# Altium PCB USB Charger Project.PcbDoc
Units mil, origin at the board's own origin, x right, y up, seen from the top; angles counter-clockwise.
Board outline 1750 x 2560 mil, 2 copper layers (Top Layer, Bottom Layer); 36 components, 19 nets, 143 pads, 23 vias.
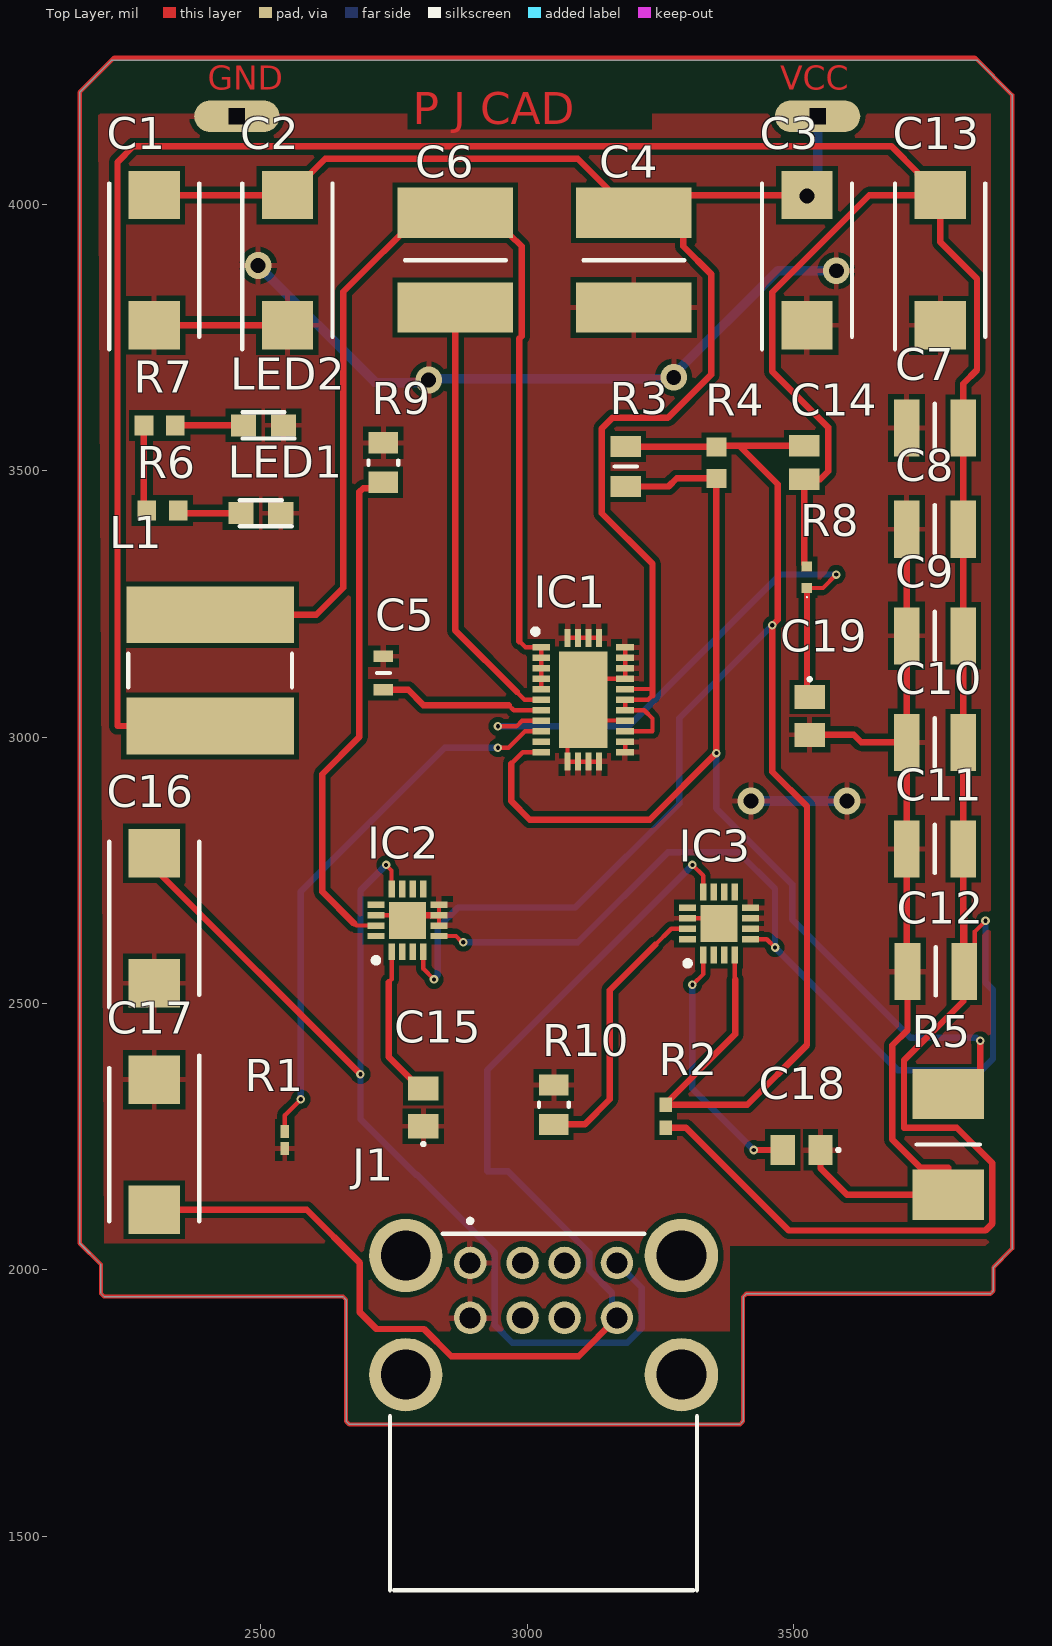
[diagram p0: Top Layer view]
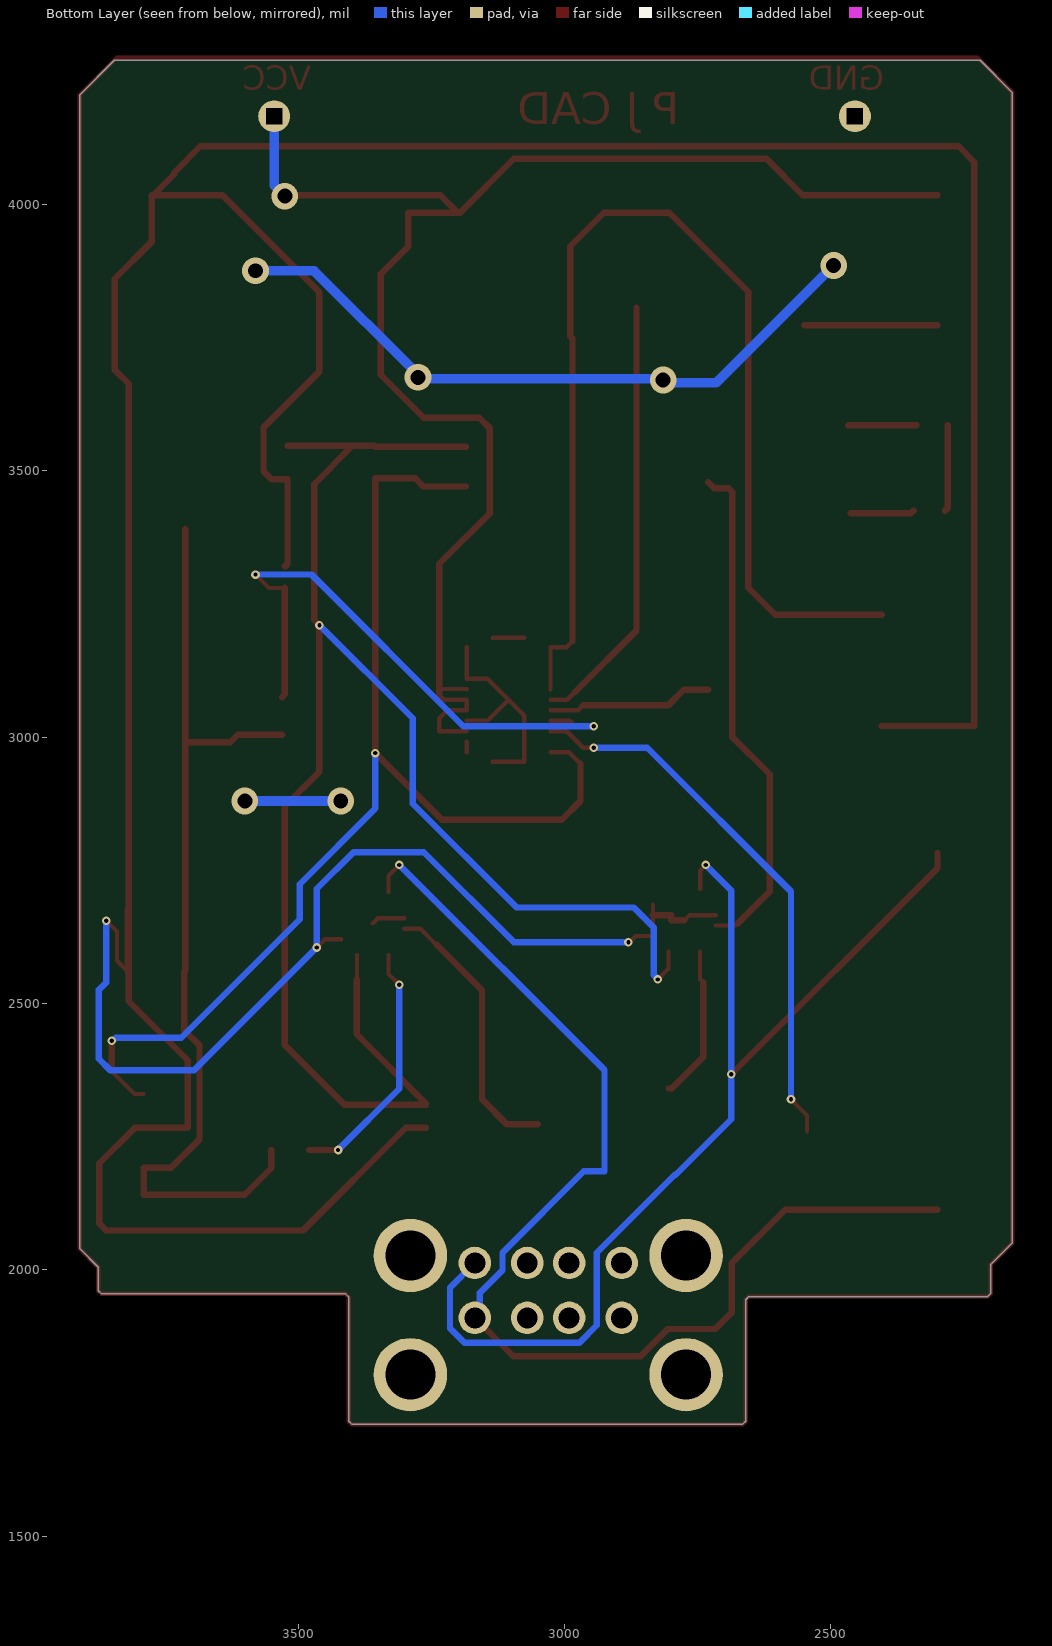
[diagram p1: Bottom Layer view, seen from below]
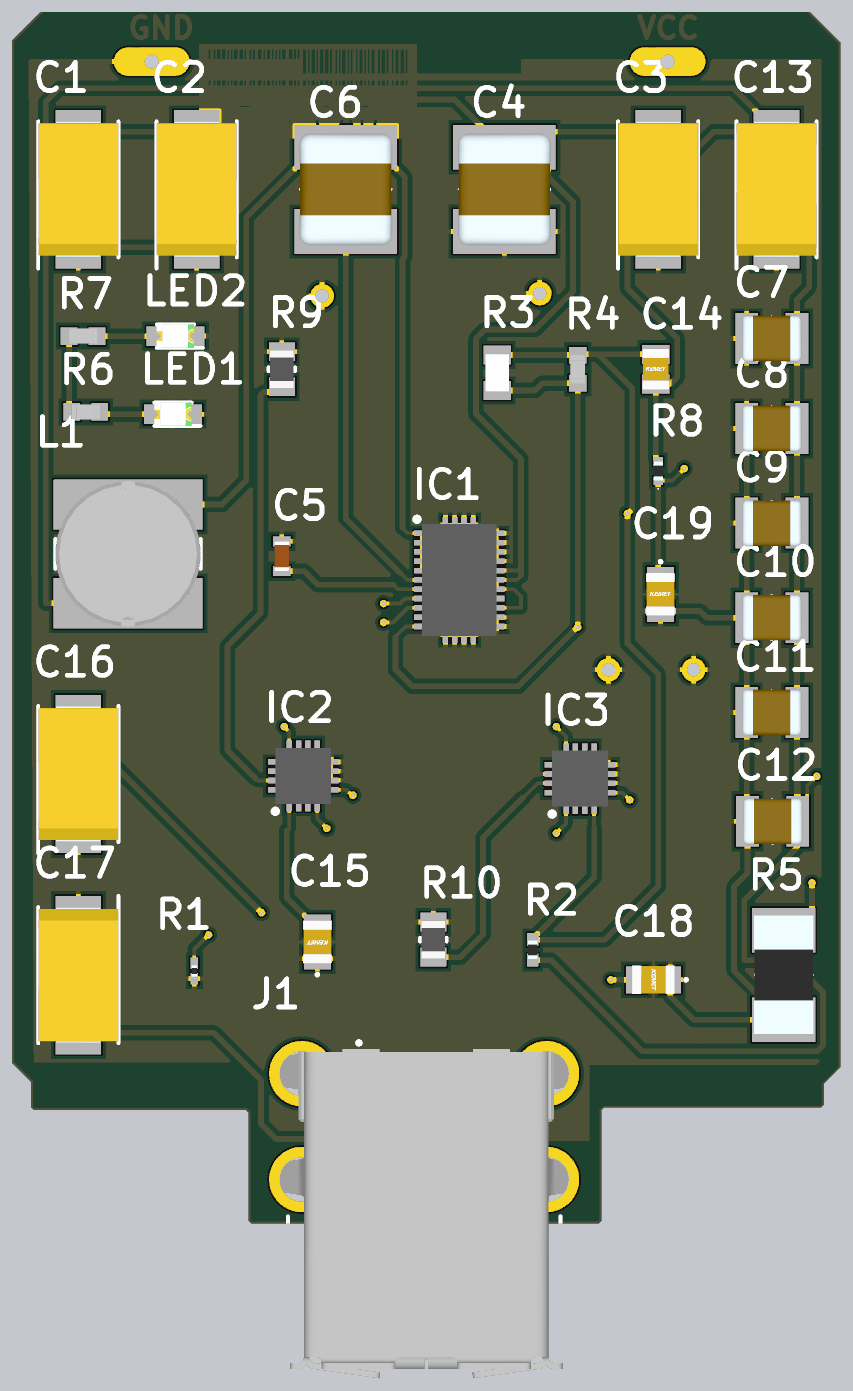
[diagram p2: 3D render of the assembled board from above, using the file's embedded part models]

## Layer stack, top to bottom
Top Solder: solder mask 0.4, Solder Resist, Dk 3.5
Top Layer: signal copper 1.4
Dielectric 1: dielectric 12.6, FR-4, Dk 4.8
Bottom Layer: signal copper 1.4
Bottom Solder: solder mask 0.4, Solder Resist, Dk 3.5

## Board outline
2205.86,1950 2654.14,1950 2660,1944.14 2660,1715.86 2665.86,1710 3399.14,1710 3405,1715.86 3405,1949.14 3410.86,1955 3869.14,1955 3875,1960.86 3875,2005 3910,2040 3910,4205 3845,4270 2220,4270 2160,4210 2160,2050 2200,2010 2200,1955.86

## Design rules (kind name [scope] priority, off if disabled: settings)
Clearance [All] p1: gap=10 ignorepadtopadclearanceinfootprint=FALSE except(0: Arc-Hole Track-Hole SMDPad-Hole THPad-Hole Via-Hole Fill-Hole Poly-Hole Region-Hole Text-Hole)
PolygonConnect [All] p1: connectstyle=Relief reliefconductorwidth=10 reliefentries=4 polygonreliefangle="90 Angle" airgapwidth=10
RoutingVias [All] p1: holewidth=8 width=16 viastyle="Through Hole" minholewidth=8 minwidth=16 maxholewidth=8 maxwidth=16
SolderMaskExpansion [All] p1: expansion=4 istentingtop=FALSE
Width [All] p1: maxlimit=12 minlimit=8 preferedwidth=12 toplayer_prefwidth=8 minimp=50.000000 maximp=50.000000 favimp=50.000000
30 further rules are at their usual default settings.

## Components (designator, comment, footprint, x,y, rotation, side; value= is the part's Value field where it differs from the comment)
C1 "10uF" CAPPM7343X120N 2300,3895 r90 top
C2 "10uF" CAPPM7343X120N 2550,3895 r90 top
C3 "10uF" CAPPM7343X120N 3525,3895 r90 top
C4 "0.47uF" CAPC6050X550N 3200,3895 r90 top
C5 "2.2uF" CAPC1608X80N 2730,3120 r90 top
C6 "0.47uF" CAPC6050X550N 2865,3895 r270 top
C7 "47uF" CAPC3225X270N 3765,3580 r0 top
C8 "47uF" CAPC3225X270N 3765,3390 r0 top
C9 "47uF" CAPC3225X270N 3765,3190 r0 top
C10 "47uF" CAPC3225X270N 3765,2990 r0 top
C11 "47uF" CAPC3225X270N 3765,2790 r0 top
C12 "47uF" CAPC3225X270N 3766.85,2560 r0 top
C13 "10uF" CAPPM7343X120N 3775,3895 r90 top
C14 "0.022uF" CAPC2012X88N 3520,3515 r270 top
C15 "0.1uF" C0805 2805,2305 r90 top
C16 "10uF" CAPPM7343X120N 2300,2660 r90 top
C17 "10uF" CAPPM7343X120N 2300,2235 r270 top
C18 "0.1uF" C0805 3515,2225 r180 top
C19 "0.1uF" C0805 3530,3039.57 r270 top
IC1 "LM73606" QFN50P400X600X80-31N-D 3105,3070 r0 top
IC2 "TPS2549IRTERQ1" QFN50P300X300X80-17N-D 2775.16,2655.94 r90 top
IC3 "TPS2549IRTERQ1" QFN50P300X300X80-17N-D 3360,2650 r90 top
J1 "5787745-4" 57877454 2892.83,2013.15 r0 top
L1 "6.8uH" SDR08056R8ML 2405,3125 r180 top
LED1 "green" LEDM2012X80N 2500,3420 r180 top
LED2 "green" LEDM2012X80N 2505,3585 r180 top
R1 "112k" RESC0603X28N 2545,2243.78 r90 top
R2 "2.1k" RESC1005X35N 3260,2288.35 r270 top
R3 "47k" RESC2012X65N 3185,3507.6 r90 top
R4 "200k" RESC1608X55N 3355,3515 r90 top
R5 "10k" RESC6432X120N 3790,2235.51 r90 top
R6 "715" RESC1608X55N 2315.47,3425 r0 top
R7 "715" RESC1608X55N 2310,3585 r0 top
R8 "3.0R" ERJ2RKD1004X 3525,3300 r90 top
R9 "20K" RESC2013X65N 2730,3515 r270 top
R10 "20K" RESC2013X65N 3050,2310 r270 top

## Footprints (in the part's own frame and the unit in brackets; to place one, negate y for a bottom-side part, rotate by r counter-clockwise, add the part's x,y. Pads: shape width x height; smd on the part's side, far side on the other; paste and mask are expansions set on the pad)
57877454 [mm]
  round 1.55 hole 1: 1(0,0) 2(2.5,0) 3(4.5,0) 4(7,0) 5(0,-2.62) 6(2.5,-2.62) 7(4.5,-2.62) 8(7,-2.62)
  round 3.5 hole 2.38: MH1(-3.07,0.35) MH2(-3.07,-5.33) MH3(10.07,0.35) MH4(10.07,-5.33)
  silkscreen extent -3.81,-15.61 10.81,2.1, body extent -4.51,-16 11.73,1.68, height 15.97
C0805 [mm]
  rect 1.15x1.45 smd: 1(-0.9,0) 2(0.9,0)
  silkscreen extent -1.8,-0.05 -1.7,0.05, body extent -1.15,-0.78 1.15,0.77, height 0.98
CAPC1608X80N [mm]
  rect 0.54x0.94 smd: 1(-0.8,0) 2(0.8,0)
  silkscreen extent 0,-0.3 0,0.3, body extent -0.8,-0.4 0.8,0.4, height 0.8
CAPC2012X88N [mm]
  rect 1.02x1.47 smd: 1(-0.8,0) 2(0.8,0)
  body extent -1.1,-0.73 1.1,0.72, height 0.88
CAPC3225X270N [mm]
  rect 1.22x2.72 smd: 1(-1.35,0) 2(1.35,0)
  silkscreen extent 0,-1.15 0,1.15, body extent -1.6,-1.25 1.6,1.25, height 2.7
CAPC6050X550N [mm]
  rect 2.39x5.51 smd: 1(-2.26,0) 2(2.26,0)
  silkscreen extent 0,-2.4 0,2.4, body extent -3,-2.5 3,2.5, height 5.5
CAPPM7343X120N [mm]
  rect 2.3x2.45 smd: 1(-3.1,0) 2(3.1,0)
  silkscreen extent -4.25,-2.15 3.65,2.15, body extent -3.65,-2.15 3.65,2.15, height 1.2
ERJ2RKD1004X [mm]
  rect 0.475x0.5 smd: 1(-0.512,0) 2(0.512,0)
  silkscreen extent -0.97,-0.03 -0.93,0.03, body extent -0.5,-0.25 0.5,0.25, height 0.35
LEDM2012X80N [mm]
  rect 1.2x1.05 smd: 1(-0.95,0) 2(0.95,0)
  silkscreen extent -1.47,-0.62 1,0.62, body extent -1,-0.63 1,0.63, height 0.7
QFN50P300X300X80-17N-D [mm]
  rect 0.8x0.3 smd: 1(-1.5,0.75) 2(-1.5,0.25) 3(-1.5,-0.25) 4(-1.5,-0.75) 9(1.5,-0.75) 10(1.5,-0.25) 11(1.5,0.25) 12(1.5,0.75)
  rect 0.3x0.8 smd: 5(-0.75,-1.5) 6(-0.25,-1.5) 7(0.25,-1.5) 8(0.75,-1.5) 13(0.75,1.5) 14(0.25,1.5) 15(-0.25,1.5) 16(-0.75,1.5)
  rect 1.76x1.76 smd: 17(0,0)
  silkscreen extent -2.02,1.37 -1.78,1.62, body extent -1.5,-1.5 1.5,1.5, height 0.8
QFN50P400X600X80-31N-D [mm]
  rect 0.85x0.3 smd: 1(-2,2.5) 2(-2,2) 3(-2,1.5) 4(-2,1) 5(-2,0.5) 6(-2,0) 7(-2,-0.5) 8(-2,-1) 9(-2,-1.5) 10(-2,-2) 11(-2,-2.5) 16(2,-2.5) 17(2,-2) 18(2,-1.5) 19(2,-1) 20(2,-0.5) 21(2,0) 22(2,0.5) 23(2,1) 24(2,1.5) 25(2,2) 26(2,2.5)
  rect 0.3x0.85 smd: 12(-0.75,-2.95) 13(-0.25,-2.95) 14(0.25,-2.95) 15(0.75,-2.95) 27(0.75,2.95) 28(0.25,2.95) 29(-0.25,2.95) 30(-0.75,2.95)
  rect 2.3x4.6 smd: 31(0,0)
  silkscreen extent -2.4,3.13 -2.15,3.37, body extent -2,-3 2,3, height 0.8
RESC0603X28N [mm]
  rect 0.625x0.4 smd: 1(-0.412,0) 2(0.412,0)
  body extent -0.3,-0.15 0.3,0.15, height 0.28
RESC1005X35N [mm]
  rect 0.7x0.6 smd: 1(-0.55,0) 2(0.55,0)
  body extent -0.5,-0.25 0.5,0.25, height 0.35
RESC1608X55N [mm]
  rect 0.9x0.95 smd: 1(-0.75,0) 2(0.75,0)
  body extent -0.77,-0.4 0.77,0.4, height 0.46
RESC2012X65N [mm]
  rect 1x1.45 smd: 1(-0.95,0) 2(0.95,0)
  silkscreen extent 0,-0.53 0,0.53, body extent -1,-0.63 1,0.63, height 0.56
RESC2013X65N [mil]
  rect 40x55 smd: 1(-37,0) 2(37,0)
  silkscreen extent -4,-28 4,28, body extent -40,-25 40,25, height 14
RESC6432X120N [mm]
  rect 2.4x3.4 smd: 1(-2.4,0) 2(2.4,0)
  silkscreen extent 0,-1.5 0,1.5, body extent -3.17,-1.6 3.17,1.6, height 1.2
SDR08056R8ML [mm]
  rect 8x2.7 smd: 1(0,-2.65) 2(0,2.65)
  silkscreen extent -3.9,-0.8 3.9,0.8, body extent -3.9,-3.9 3.9,3.9, height 5.3

## Part data
C1 C2 C3 C13 C16 C17: library part EEF-CS1E100R, "Capacitor", Manufacturer_Name=Panasonic, Mouser Part Number=667-EEF-CS1E100R, Arrow Part Number=EEF-CS1E100R, Arrow Price/Stock=https://www.arrow.com/en/products/eef-cs1e100r/panasonic, Datasheet Link=https://industrial.panasonic.com/cdbs/www-data/pdf/ABE0000/ABE0000C49.pdf, Height=1.2mm, Manufacturer_Part_Number=EEF-CS1E100R, Mouser Price/Stock=https://www.mouser.com/Search/Refine.aspx?Keyword=667-EEF-CS1E100R
C4 C6: library part CKG57NX7R2J474M500JH, "Capacitor", Manufacturer_Name=TDK, Mouser Part Number=810-CKG57NX7R2J474M, Arrow Part Number=CKG57NX7R2J474M500JH, Arrow Price/Stock=https://www.arrow.com/en/products/ckg57nx7r2j474m500jh/tdk?region=nac, Datasheet Link=https://product.tdk.com/system/files/dam/doc/product/capacitor/ceramic/mlcc/catalog/mlcc_commercial_megacap_en.pdf, Height=5.5mm, Manufacturer_Part_Number=CKG57NX7R2J474M500JH, Mouser Price/Stock=https://www.mouser.co.uk/ProductDetail/TDK/CKG57NX7R2J474M500JH?qs=NRhsANhppD%252BAmXDR5rVERg%3D%3D
C5: library part C1608X7R0J225K080AB, "Capacitor", Manufacturer_Name=TDK, Mouser Part Number=810-C1608X7R0J225K, Arrow Part Number=C1608X7R0J225K080AB, Arrow Price/Stock=https://www.arrow.com/en/products/c1608x7r0j225k080ab/tdk, Datasheet Link=https://product.tdk.com/info/en/catalog/datasheets/mlcc_commercial_midvoltage_en.pdf, Height=0.8mm, Manufacturer_Part_Number=C1608X7R0J225K080AB, Mouser Price/Stock=https://www.mouser.co.uk/ProductDetail/TDK/C1608X7R0J225K080AB?qs=NRhsANhppD8GGBuKEoCmvQ%3D%3D
C7 C8 C9 C10 C11 C12: library part JMK325B7476KMHPR, "Capacitor", Manufacturer_Name="TAIYO YUDEN", Mouser Part Number=963-JMK325B7476KMHPR, Datasheet Link=https://ds.yuden.co.jp/TYCOMPAS/ut/detail?pn=MCASJ32MSB7476KPNB25&u=M, Height=2.7mm, Manufacturer_Part_Number=JMK325B7476KMHPR, Mouser Price/Stock=https://www.mouser.com/Search/Refine.aspx?Keyword=963-JMK325B7476KMHPR
C14: library part C0805C223K5RAC-TU, "Capacitor", Manufacturer_Name=KEMET, Arrow Part Number=C0805C223K5RAC-TU, Arrow Price/Stock=https://www.arrow.com/en/products/c0805c223k5ractu/kemet-corporation, Datasheet Link=https://connect.kemet.com:7667/gateway/IntelliData-ComponentDocumentation/1.0/download/specsheet/C0805C223K5RACTU, Height=0.88mm, Manufacturer_Part_Number=C0805C223K5RAC-TU
C15 C18 C19: library part C0805X104K5RAC3316, "Capacitor", Manufacturer_Name=KEMET, Mouser Part Number=80-C0805X104K5R3316, Arrow Part Number=C0805X104K5RAC3316, Arrow Price/Stock=https://www.arrow.com/en/products/c0805x104k5rac3316/kemet-corporation?region=nac, Datasheet Link=https://content.kemet.com/datasheets/KEM_X7R_FT_VW_AUDI.pdf, Height=1.1mm, Manufacturer_Part_Number=C0805X104K5RAC3316, Mouser Price/Stock=https://www.mouser.co.uk/ProductDetail/KEMET/C0805X104K5RAC3316?qs=vLWxofP3U2wSOEpkvhvxCw%3D%3D
IC1: library part LM73605RNPR, "Integrated Circuit", Manufacturer_Name="Texas Instruments", Mouser Part Number=595-LM73605RNPR, Datasheet Link=https://www.ti.com/lit/ds/symlink/lm73605.pdf?HQS=dis-dk-null-digikeymode-dsf-pf-null-wwe&ts=1649048227749&ref_url=https%253A%252F%252Fwww.ti.com%252Fgeneral%252Fdocs%252Fsuppproductinfo.tsp%253FdistId%253D10%2526gotoUrl%253Dhttps%253A%252F%252Fwww.ti.com, Height=0.8mm, Manufacturer_Part_Number=LM73605RNPR, Mouser Price/Stock=https://www.mouser.co.uk/ProductDetail/Texas-Instruments/LM73605RNPR?qs=G55MHhPmvtKjvNMBdwXrjw%3D%3D
IC2 IC3: "Integrated Circuit", Manufacturer_Name="Texas Instruments", Mouser Part Number=595-TPS2549IRTERQ1, Arrow Part Number=TPS2549IRTERQ1, Arrow Price/Stock=https://www.arrow.com/en/products/tps2549irterq1/texas-instruments, Datasheet Link=http://www.ti.com/lit/gpn/TPS2549-Q1, Height=0.8mm, Manufacturer_Part_Number=TPS2549IRTERQ1, Mouser Price/Stock=https://www.mouser.co.uk/ProductDetail/Texas-Instruments/TPS2549IRTERQ1?qs=bY1dm4K8r4UUPMmrjPHWqg%3D%3D
J1: "Connector", Manufacturer_Name="TE Connectivity", Mouser Part Number=571-5787745-4, Arrow Part Number=5787745-4, Arrow Price/Stock=https://www.arrow.com/en/products/5787745-4/te-connectivity, Datasheet Link=https://www.te.com/commerce/DocumentDelivery/DDEController?Action=showdoc&DocId=Customer+Drawing%7F5787745%7FA2%7Fpdf%7FEnglish%7FENG_CD_5787745_A2.pdf%7F5787745-4, Height=16.26mm, Manufacturer_Part_Number=5787745-4, Mouser Price/Stock=https://www.mouser.co.uk/ProductDetail/TE-Connectivity-AMP/5787745-4?qs=ozkTL%2FUej0Qyafe7%252BOKSRQ%3D%3D
L1: library part SDR0805-6R8ML, "Inductor", Manufacturer_Name=Bourns, Mouser Part Number=652-SDR0805-6R8ML, Datasheet Link=https://componentsearchengine.com/Datasheets/2/SDR0805-6R8ML.pdf, Height=5.3mm, Manufacturer_Part_Number=SDR0805-6R8ML, Mouser Price/Stock=https://www.mouser.co.uk/ProductDetail/Bourns/SDR0805-6R8ML?qs=uD%2FoUDWqfvRMWomOplYMJg%3D%3D
LED1 LED2: library part 150080GS75000, "LED", Manufacturer_Name="Wurth Elektronik", Mouser Part Number=710-150080GS75000, Datasheet Link=https://katalog.we-online.com/led/datasheet/150080GS75000.pdf, Height=0.8mm, Manufacturer_Part_Number=150080GS75000, Mouser Price/Stock=https://www.mouser.co.uk/ProductDetail/Wurth-Elektronik/150080GS75000?qs=2kOmHSv6VfQRoTEZVk1mGA%3D%3D
R1: library part CRCW020112K1FNED, "Resistor", Manufacturer_Name=Vishay, Datasheet Link=http://www.vishay.com/docs/20035/dcrcwe3.pdf, Height=0.28mm, Manufacturer_Part_Number=CRCW020112K1FNED
R2: library part CPF0402B2K1E1, "Resistor", Manufacturer_Name="TE Connectivity", Datasheet Link=http://www.farnell.com/datasheets/1786775.pdf, Height=0.35mm, Manufacturer_Part_Number=CPF0402B2K1E1
R3: library part CRG0805F47K, "Resistor", Manufacturer_Name="TE Connectivity", Mouser Part Number=279-CRG0805F47K, Arrow Part Number=CRG0805F47K, Arrow Price/Stock=https://www.arrow.com/en/products/crg0805f47k/te-connectivity?region=nac, Datasheet Link=http://www.te.com/commerce/DocumentDelivery/DDEController?Action=showdoc&DocId=Customer+Drawing%7F1623109%7FBA%7Fpdf%7FEnglish%7FENG_CD_1623109_BA.pdf%7F1623109-1, Height=0.65mm, Manufacturer_Part_Number=CRG0805F47K, Mouser Price/Stock=https://www.mouser.co.uk/ProductDetail/TE-Connectivity-Holsworthy/CRG0805F47K?qs=VHcS2MTj4gZHzoMPVVm%252BWg%3D%3D
R4: library part CRGH0603F20K, "Resistor", Manufacturer_Name="TE Connectivity", Mouser Part Number=279-CRGH0603F20K, Datasheet Link=http://docs-europe.electrocomponents.com/webdocs/12d7/0900766b812d7379.pdf, Height=0.55mm, Manufacturer_Part_Number=CRGH0603F20K, Mouser Price/Stock=https://www.mouser.co.uk/ProductDetail/TE-Connectivity-Holsworthy/CRGH0603F20K?qs=iJVBkmKXgrmcei%252BB1D3Tlg%3D%3D
R5: library part 352110KFT, "Resistor", Manufacturer_Name="TE Connectivity", Mouser Part Number=279-352110KFT, Arrow Part Number=352110KFT, Arrow Price/Stock=https://www.arrow.com/en/products/352110kft/te-connectivity, Datasheet Link=https://eagle.componentsearchengine.com/Datasheets/2/352110KFT.pdf, Height=1.2mm, Manufacturer_Part_Number=352110KFT, Mouser Price/Stock=https://www.mouser.co.uk/ProductDetail/TE-Connectivity-Holsworthy/352110KFT?qs=IXkKOuu5vnE9cBrG90Zs%2Fw%3D%3D
R6 R7: library part CPF0603B715RE1, "Resistor", Manufacturer_Name="TE Connectivity", Datasheet Link=http://www.farnell.com/datasheets/1786775.pdf, Height=0.55mm, Manufacturer_Part_Number=CPF0603B715RE1
R8: library part ERJ-2GEJ3R0X, "Resistor", Manufacturer_Name=Panasonic, Mouser Part Number=667-ERJ-2GEJ3R0X, Arrow Part Number=ERJ-2GEJ3R0X, Arrow Price/Stock=https://www.arrow.com/en/products/erj-2gej3r0x/panasonic, Datasheet Link=https://datasheet.datasheetarchive.com/originals/distributors/DKDS40/DSANUWW0010665.pdf, Height=0.4mm, Manufacturer_Part_Number=ERJ-2GEJ3R0X, Mouser Price/Stock=https://www.mouser.com/Search/Refine.aspx?Keyword=667-ERJ-2GEJ3R0X
R9 R10: library part TNPW080520K0BEEN, "Resistor", Manufacturer_Name=Vishay, Mouser Part Number=71-TNPW080520K0BEEN, Arrow Part Number=TNPW080520K0BEEN, Arrow Price/Stock=https://www.arrow.com/en/products/tnpw080520k0been/vishay?region=nac, Datasheet Link=http://componentsearchengine.com/Datasheets/1/TNPW080520K0BEEN.pdf, Manufacturer_Part_Number=TNPW080520K0BEEN, Mouser Price/Stock=https://www.mouser.co.uk/ProductDetail/Vishay-Dale/TNPW080520K0BEEN?qs=Db%252BqmG6P6GbXMUPhkKoL5w%3D%3D

## Free pads (board coordinates)
  oval 160x60 / inner round 60 / far side round 60 hole 30 square: 10(3545,4165) 11(2455,4165)

## Via types
v1: diameter 16, hole 8, Top Layer to Bottom Layer, 16 vias
v2: diameter 50, hole 28, Top Layer to Bottom Layer, 7 vias

## Nets (pads, with @x,y where several pads share a name; then routed paths per layer and width w, separated by ;. In a path a pad name is that pad's centre, name@x,y a point inside that pad or via, vN(x,y) a via of type N, cw(c..) or ccw(c..) an arc to the next point about the centre after c; other vN are vias at no path point)
+12: C1.2 C2.2 C3.2 C4.2 IC1.18 IC1.20 IC1.21 IC1.22 pad.10 | length 2931
  Top Layer w8: IC1.18 3235,3010.94 3235,3035 3219.68,3050.32 IC1.20 IC1.21 3226.61,3070 3235,3078.39 ; IC1.22 3184.05,3090 3235,3090
  Top Layer w12: C1.2 C2.2 2552.95,4017.05 2620.9,4085 3095.02,4085 3196.05,3983.98 C4.2 ; 3235,3078.39 3235,3090 3235,3325 3140,3420 3140,3579 3160,3599 3264,3599 3345,3680 3345,3869 3293,3921 3293,3983.98 C4.2 ; C3.2 3233.07,4017.05 C4.2
  Bottom Layer w12: v2(3525,4015) 3545,4035
  Bottom Layer w18: 3545,4035 pad.10
DIM: R6.1 R7.1 | length 162.3
  Top Layer w12: R7.1 2280.47,3430.47 R6.1
GND: C1.1 C2.1 C3.1 C4.1 C5.2 C7.1 C8.1 C9.1 C10.1 C11.1 C12.1 C13.1 C15.1 C16.1 C17.1 C18.1 C19.2 IC1.12 IC1.13 IC1.14 IC1.15 IC1.16 IC1.17 IC1.19 IC1.23 IC1.24 IC1.25 IC1.26 IC1.27 IC1.28 IC1.29 IC1.30 IC1.31 IC2.6 IC2.7 IC2.8 IC2.14 IC2.17 IC3.6 IC3.7 IC3.8 IC3.14 IC3.17 J1.1 J1.5 LED1.1 LED2.1 pad.11 R1.1 R5.1 R9.1 R10.1 | length 4262.5
  Top Layer w8: IC2.14 2765.32,2665.79 IC2.17 ; IC2.6 IC2.7 IC2.8 ; IC1.30 IC1.29 IC1.28 IC1.27 ; IC1.15 IC1.14 IC1.13 IC1.12 3075.47,3040.47 IC1.31 ; IC1.16 IC1.17 ; IC1.19 3183.52,3030.85 3144.15,3030.85 IC1.31 ; IC1.23 3144.37,3109.37 IC1.31 ; IC1.23@3183.74,3110.85 IC1.24 IC1.25 IC1.26 ; IC3.14 3350.16,2659.84 IC3.17
  Top Layer w12: C1.1 C2.1 ; IC2.17 2800,2655.94 2800,2665.79 IC2.7 ; C19.2 3613,3004.13 3627.13,2990 C10.1 ; C18.1 3550.43,2190.59 3600,2141.02 R5.1 3790,2192 3737.82,2192 3685.07,2244.75 3685.07,2421.37 3713.7,2450 C12.1 3711.85,2561.85 C11.1 C10.1 ; C8.1 C9.1 3711.85,3120 3712,3119.85 3712,2990 C10.1
  Bottom Layer w18: v2(2495,3885) 2715,3665 2810,3665 2817.5,3672.5 3272.5,3672.5 v2(3275,3675) 3275,3680 3470,3875 v2(3580,3875) ; v2(3420,2880) v2(3600,2880)
  other v2: 2815,3670
NetC5_1: C5.1 IC1.7 | length 312.1
  Top Layer w8: 2965,3060 2974.68,3050.32 IC1.7
  Top Layer w12: C5.1 2776.5,3088.5 2805,3060 2965,3060
NetC6_1: C6.1 IC1.1 IC1.2 IC1.3 IC1.4 IC1.5 L1.1 | length 2116.1
  Top Layer w8: 2985,3180 2996.57,3168.43 IC1.1 IC1.2 IC1.3 IC1.4 IC1.5
  Top Layer w12: L1.1 2604.33,3229.33 2655,3280 2655,3835.39 2803.58,3983.98 C6.1 2926.42,3983.98 2967.46,3942.93 2989.46,3920.93 2989.46,3752.35 2985,3747.88 2985,3180
NetC6_2: C6.2 IC1.6 | length 821.1
  Top Layer w8: 2980,3085 2995,3070 IC1.6
  Top Layer w12: C6.2 2865,3200 2980,3085
NetC7_2: C7.2 C8.2 C9.2 C10.2 C11.2 C12.2 C13.2 C14.2 IC2.5 IC3.5 L1.2 R2.2 R8.2 | length 8556.3
  Top Layer w8: IC2.5 2866.42,2626.42 2877.84,2615 v1(2880,2615) ; IC3.5 3449.53,2620.47 v1(3465,2605) ; C12.2 3840.02,2580.02 3840.02,2635.02 v1(3860,2655)
  Top Layer w12: L1.2 2231,3020.67 2231,4079 2260.5,4108.5 3683.55,4108.5 3732.77,4059.28 3732.77,4056.32 C13.2@3772.05,4017.05 ; R2.2 3298,2266.69 3490.69,2074 3860,2074 3873,2087 3873,2200 3806.25,2266.75 3707.07,2266.75 3707.07,2393.25 3818.15,2504.33 3818.15,2676.85 ; R8.2 3524.51,3320.16 3520,3324.67 C14.2 3550,3483.5 3565,3498.5 3565,3581 3460,3686 3460,3835 3642.05,4017.05 C13.2@3772.05,4017.05 ; C12.2 3820,2675 3818.15,2676.85 ; C13.2@3772.05,4017.05 C13.2 3775,3929 3844,3860 3844,3688.85 3818.15,3663 C7.2 C8.2 C9.2 C10.2 C11.2 3818.15,2676.85
  Bottom Layer w12: v1(2880,2615) 3095,2615 3264,2784 3396,2784 3465,2715 v1(3465,2605) 3695,2375 3852.97,2375 3874,2396.03 3874,2525.39 3860,2539.39 v1(3860,2655)
NetC14_1: C14.1 IC2.4 IC3.4 R2.1 R3.2 R4.2 | length 3281.5
  Top Layer w8: IC2.4 2804.69,2565.31 v1(2825,2545) ; IC3.4 3389.53,2545.47 3390,2545
  Top Layer w12: R3.2 R4.2@3354.53,3545 ; R4.2 3356.97,3546.5 C14.1 ; 3390,2545 3390,2441.97 3260,2311.97 R2.1 3413,2310 3525,2422 3525,2870 3460,2935 v1(3460,3210) 3470,3220 3470,3474.53 3400,3544.53
  Bottom Layer w12: v1(2825,2545) 2825,2546.08 2832.27,2553.35 2832.27,2642.27 2870,2680 3090,2680 3285,2875 3285,3035 v1(3460,3210)
NetC15_2: C15.2 IC2.1 | length 289.2
  Top Layer w8: 2740,2540 2745.63,2545.63 IC2.1
  Top Layer w12: 2740,2540 2740,2399.53 2799.09,2340.43 C15.2
NetC16_2: C16.2 IC2.12 J1.4 | length 2056.1
  Top Layer w8: v1(2735,2760) 2745.41,2749.59 2745.41,2715.22 IC2.12
  Top Layer w12: C16.2 2300,2754 v1(2687,2367)
  Bottom Layer w12: v1(2735,2760) 2687,2712 v1(2687,2367) 2687,2283 2791.29,2178.71 2793.05,2178.71 2939.35,2032.42 2939.35,1896.14 2971.99,1863.49 3187.69,1863.49 3214.94,1890.73 3214.94,1966.64 J1.4
NetC17_2: C17.2 IC3.12 J1.8 | length 2259.1
  Top Layer w8: v1(3310,2760) 3330.47,2739.53 IC3.12
  Top Layer w12: C17.2 2586.05,2112.95 2686,2013 2686,1920 2717,1889 2806.34,1889 2857.34,1838 3096.43,1838 J1.8
  Bottom Layer w12: J1.8 3159.05,1919.38 3159.05,1956.75 3116.51,1999.29 3116.51,2032.42 2963.93,2185 2925,2185 2925,2375 v1(3310,2760)
NetC18_2: C18.2 IC3.1 | length 476.6
  Top Layer w8: v1(3310,2535) 3330.47,2555.47 IC3.1
  Top Layer w12: v1(3425,2225) C18.2
  Bottom Layer w12: v1(3310,2535) 3310,2340 v1(3425,2225)
NetC19_1: C19.1 IC1.8 R8.1 | length 1111
  Top Layer w8: v1(2945,3020) 2979.56,3020 2990.19,3030.63 IC1.8 ; R8.1 3554.84,3279.84 v1(3580,3305)
  Top Layer w12: R8.1 3525,3080 C19.1
  Bottom Layer w12: v1(2945,3020) 3190,3020 3475,3305 v1(3580,3305)
NetIC1_9: IC1.9 R1.2 | length 1038.3
  Top Layer w8: R1.2 2545,2290 v1(2575,2320) ; v1(2945,2980) 2965.02,2980 2995.96,3010.94 IC1.9
  Bottom Layer w12: v1(2575,2320) 2575,2710 2845,2980 v1(2945,2980)
NetIC1_11: IC1.11 R3.1 R4.1 R5.2 | length 2231.3
  Top Layer w8: 2970,2950 2991.57,2971.57 IC1.11 ; R5.2 3806.76,2330 R5.2@3850,2373.24
  Top Layer w12: 2970,2950 2970,2880 3005,2845 3230,2845 v1(3355,2970) R4.1 3280.47,3485.47 3265.2,3470.2 R3.1 ; R5.2@3850,2373.24 v1(3850,2430)
  Bottom Layer w12: v1(3355,2970) 3355,2866 3497,2724 3497,2658 3719.32,2435.68 3842.55,2435.68 v1@3849.58,2428.66
NetIC2_15: IC2.15 R9.2 | length 959
  Top Layer w8: 2675,2650 2678.9,2646.1 IC2.15
  Top Layer w12: 2675,2650 2615,2710 2615,2930 2685,3000 2685,3459.99 2692.03,3467.01 2719.01,3467.01 R9.2
NetIC3_15: IC3.15 R10.2 | length 523.1
  Top Layer w8: 3240,2610 3270.16,2640.16 IC3.15
  Top Layer w12: R10.2 3108,2273 3155,2320 3155,2525 3240,2610
NetLED1_2: LED1.2 R6.2 | length 119.7
  Top Layer w12: R6.2 2350,3420 LED1.2
NetLED2_2: LED2.2 R7.2 | length 128.1
  Top Layer w12: R7.2 LED2.2
pads on no net: IC1.10 IC2.2 IC2.3 IC2.9 IC2.10 IC2.11 IC2.13 IC2.16 IC3.2 IC3.3 IC3.9 IC3.10 IC3.11 IC3.13 IC3.16 J1.2 J1.3 J1.6 J1.7 J1.MH1 J1.MH2 J1.MH3 J1.MH4
copper on no net: | length 8486.4
  Top Layer w8: 2160,2050 2200,2010 2200,1955.86 2205.86,1950 2654.14,1950 2660,1944.14 2660,1715.86 2665.86,1710 3399.14,1710 3405,1715.86 3405,1949.14 3410.86,1955 3869.14,1955 3875,1960.86 3875,2005 3910,2040 3910,4205 3840,4275 2225,4275 2160,4210 2160,2050

## Polygon pours and split planes (outlines as drawn)
GND on Top Layer "GND_L01_P000" (solid, pour order 0): 2194.81,4170 3870,4170 3870,2055 3860,2045 3380,2045 3380,1884.99 2665.86,1884.99 2665.86,2050 2205.91,2050

## Other copper
Top Layer:
  text "GND" at 2400,4215 h45
  text "VCC" at 3475,4215 h45
  text "P J CAD" at 2785,4150 h60